# EAGLE board Stand Alone Portable (EAGLE 5.11)
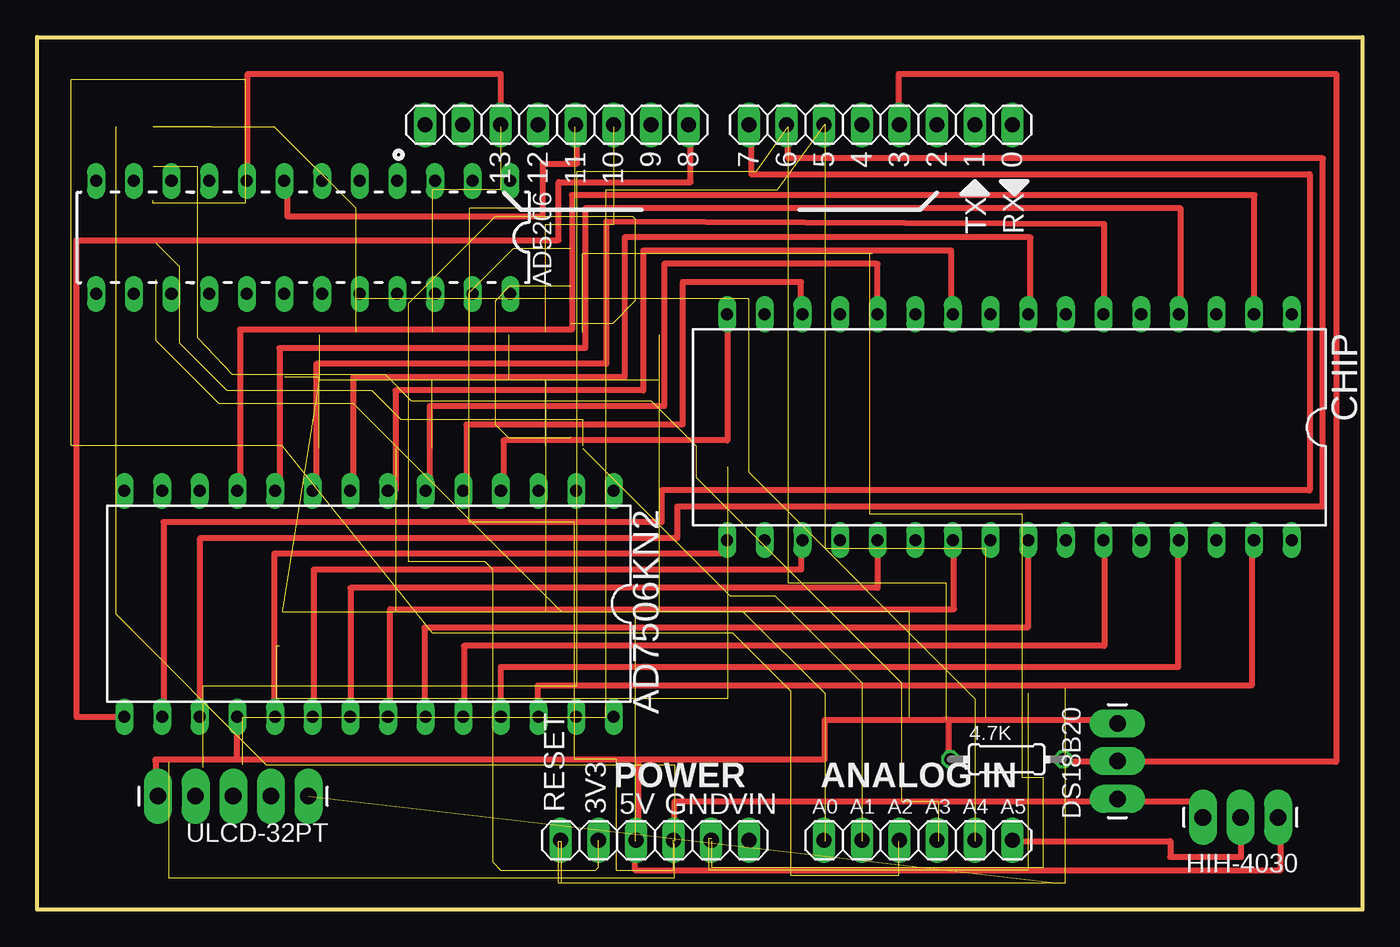
[diagram p0: board, top side]
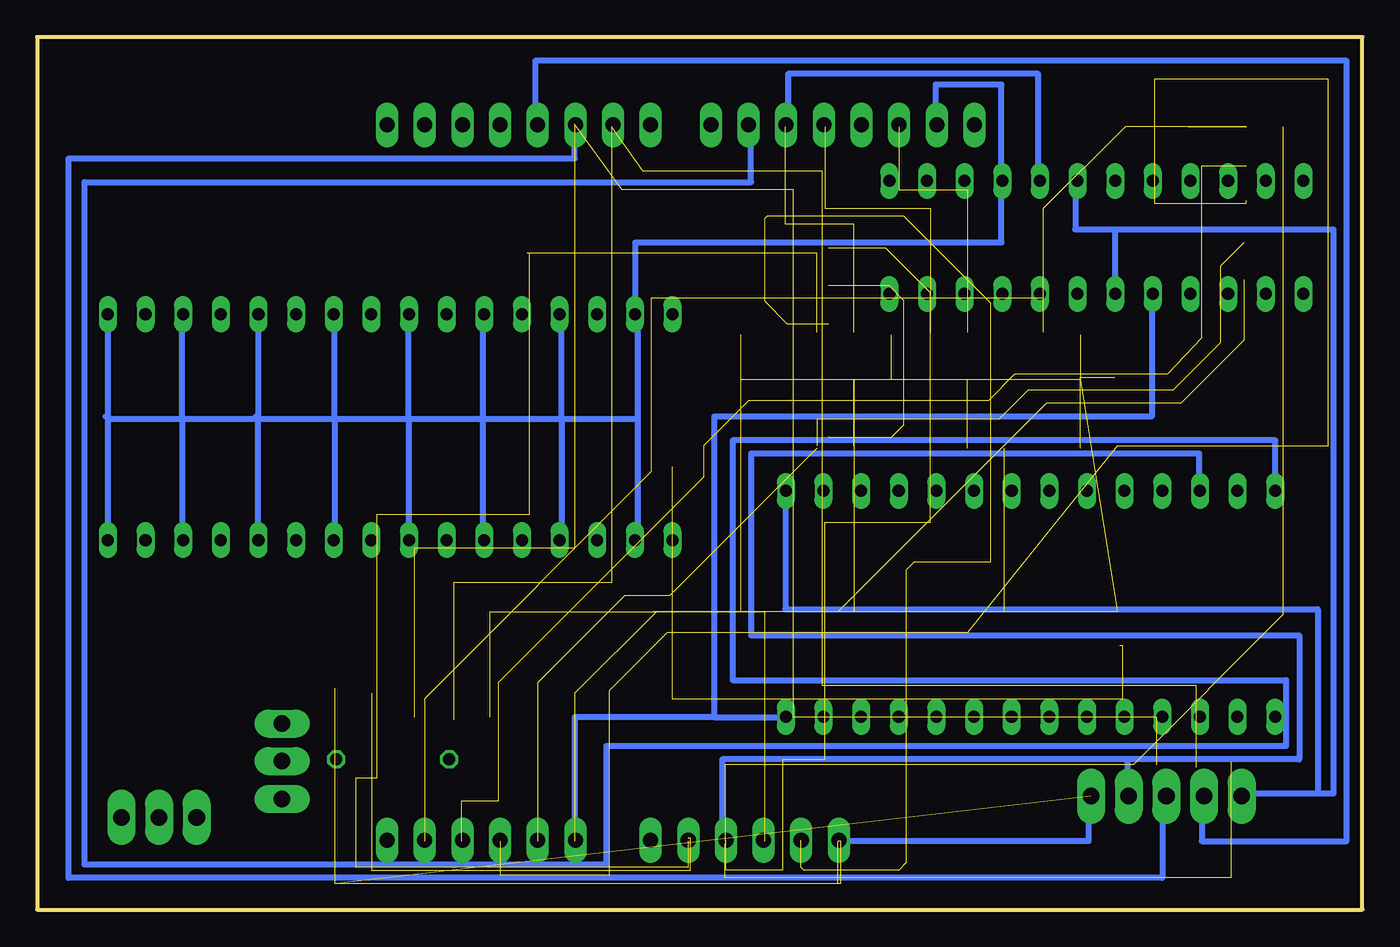
[diagram p1: board, bottom side, seen from below]

Size 89.43 x 58.85 mm. Coordinates in mm from the lower left corner, seen from the top.
Outline: 0,58.85 89.43,58.85 89.43,0 0,0 0,58.85
Copper layers (1*16): Top 0.035mm / dielectric 1.5mm / Bottom 0.035mm
Design rules "ArduinoDEF": minimum track width 6mil, minimum drill 12mil, track to track 6mil, track to pad 6mil, pad to pad 6mil, via to via 6mil, smd to smd 6mil, copper to edge 20mil, drill to drill 6mil, minimum pad ring 8mil, minimum via ring 8mil, stop-mask expansion 0mil, vias tented up to drill 0mil, thermal gap 10mil
Net classes: 0 default: width 0.254 mm, clearance 0.254 mm; 1 power: width 0.61 mm, drill 0.61 mm, clearance 0.254 mm; 2 gnd: width 0.305 mm, drill 0.559 mm, clearance 0.254 mm; 3 usbvcc: width 0.508 mm, drill 0.61 mm, clearance 0.254 mm; 4 aref: width 0.406 mm, drill 0.61 mm, clearance 0.254 mm
vRestrict: area 25.2,46.2 to 26.9,51.3; area 27.7,47.6 to 29.4,51.3; area 30.8,47.5 to 31.9,50.9; area 33.3,47.5 to 34.4,50.9; area 35.8,47.5 to 37,50.9; area 38.4,47.5 to 39.5,50.9; area 41,49.4 to 42.2,50.9; area 42.6,47.2 to 49.9,49; area 62.6,46.3 to 64,48.9; area 65.2,46.3 to 66.6,48.9; area 63.7,37.9 to 67.1,39.3; area 2.9,24 to 4.3,32.2; 14 more areas

## Footprints (pad centres in the part's own frame; a part is rotated, then mirrored left to right if it is on the bottom)
0204/7 = drill 0.813 octagon: 1 -3.81,0; 2 3.81,0
1X06 = drill 1.016 long: 1 -6.35,0; 2 -3.81,0; 3 -1.27,0; 4 1.27,0; 5 3.81,0; 6 6.35,0
DIL24 = drill 0.813 long: 1 -13.97,-3.81; 2 -11.43,-3.81; 3 -8.89,-3.81; 4 -6.35,-3.81; 5 -3.81,-3.81; 6 -1.27,-3.81; 7 1.27,-3.81; 8 3.81,-3.81; 9 6.35,-3.81; 10 8.89,-3.81; 11 11.43,-3.81; 12 13.97,-3.81; 13 13.97,3.81; 14 11.43,3.81; 15 8.89,3.81; 16 6.35,3.81; 17 3.81,3.81; 18 1.27,3.81; 19 -1.27,3.81; 20 -3.81,3.81; 21 -6.35,3.81; 22 -8.89,3.81; 23 -11.43,3.81; 24 -13.97,3.81
DIL28-6 = drill 0.813 long: 1 -16.51,-7.62; 2 -13.97,-7.62; 3 -11.43,-7.62; 4 -8.89,-7.62; 5 -6.35,-7.62; 6 -3.81,-7.62; 7 -1.27,-7.62; 8 1.27,-7.62; 9 3.81,-7.62; 10 6.35,-7.62; 11 8.89,-7.62; 12 11.43,-7.62; 13 13.97,-7.62; 14 16.51,-7.62; 15 16.51,7.62; 16 13.97,7.62; 17 11.43,7.62; 18 8.89,7.62; 19 6.35,7.62; 20 3.81,7.62; 21 1.27,7.62; 22 -1.27,7.62; 23 -3.81,7.62; 24 -6.35,7.62; 25 -8.89,7.62; 26 -11.43,7.62; 27 -13.97,7.62; 28 -16.51,7.62
DIL32 = drill 0.813 long: 1 -19.05,-7.62; 2 -16.51,-7.62; 3 -13.97,-7.62; 4 -11.43,-7.62; 5 -8.89,-7.62; 6 -6.35,-7.62; 7 -3.81,-7.62; 8 -1.27,-7.62; 9 1.27,-7.62; 10 3.81,-7.62; 11 6.35,-7.62; 12 8.89,-7.62; 13 11.43,-7.62; 14 13.97,-7.62; 15 16.51,-7.62; 16 19.05,-7.62; 17 19.05,7.62; 18 16.51,7.62; 19 13.97,7.62; 20 11.43,7.62; 21 8.89,7.62; 22 6.35,7.62; 23 3.81,7.62; 24 1.27,7.62; 25 -1.27,7.62; 26 -3.81,7.62; 27 -6.35,7.62; 28 -8.89,7.62; 29 -11.43,7.62; 30 -13.97,7.62; 31 -16.51,7.62; 32 -19.05,7.62
1X03_LONGPADS = drill 1.118 pad 1.88 long: 1 0,0; 2 2.54,0; 3 5.08,0
1X08 = drill 1.016 long: 1 -8.89,0; 2 -6.35,0; 3 -3.81,0; 4 -1.27,0; 5 1.27,0; 6 3.81,0; 7 6.35,0; 8 8.89,0
1X05_LONGPADS = drill 1.118 pad 1.88 long: 1 0,0; 2 2.54,0; 3 5.08,0; 4 7.62,0; 5 10.16,0

## Placement (x,y rotation side)
4.7K  [0204/7]  65.43,10.13 0 top
AD  [1X06]  59.46,4.67 0 top
AD5206  [DIL24]  17.96,45.34 180 top
AD7506KN2  [DIL28-6]  22.4,20.62 180 top
CHIP  [DIL32]  65.61,32.54 180 top
DS18B20  [1X03_LONGPADS]  72.9,7.47 90 top
HIH-4030  [1X03_LONGPADS]  83.74,6.22 180 top
IOH  [1X08]  35.08,52.93 180 top
IOL  [1X08]  56.92,52.93 180 top
POWER  [1X06]  41.68,4.67 0 top
ULCD-32PT  [1X05_LONGPADS]  18.31,7.65 180 top

## Library data of the parts
4.7K = rcl
AD IOH IOL POWER = pinhead
AD5206 DS18B20 HIH-4030 ULCD-32PT = SparkFun
AD7506KN2 = 40xx
CHIP = atmel

## Nets
N$6: POWER.4
N$7: POWER.2
N$8: IOL.1
N$9: IOL.2
N$10: POWER.5
N$11: AD.1
N$13: AD.2
N$14: AD.3
N$16: AD.4
N$17: AD.5
S$6: ULCD-32PT.1

## Tracks (layer width: path | path; a pad name or v marks a point on that pad's centre or on a via)
N$1  (6 unrouted)
N$6  (9 unrouted)
N$7  (14 unrouted)
S$1  (8 unrouted)
S$2  (8 unrouted)
S$3  (3 unrouted)
S$4  (4 unrouted)
S$5  (4 unrouted)
S$6  (3 unrouted)
S$7  (1 unrouted)
S$8  (21 unrouted)
S$9  (3 unrouted)
S$10  (3 unrouted)
S$11  (3 unrouted)
S$12  (7 unrouted)
S$13  (9 unrouted)
S$14  (4 unrouted)
S$15  (7 unrouted)
S$16  (12 unrouted)
S$17  (5 unrouted)
S$18  (8 unrouted)
S$19  (1 unrouted)
S$20  (4 unrouted)
S$21  (2 unrouted)
S$22  (1 unrouted)
S$23  (2 unrouted)
S$24
  Bottom 0.406: 48.9,33.07 48.9,40.18 | 54.05,33.07 59.39,33.07 | 59.39,33.07 64.36,33.07 | 64.36,33.07 69.34,33.07 | 69.34,33.07 79.65,33.07 | 54.05,33.07 54.05,40.36 | 48.9,33.07 54.05,33.07 | 64.36,33.07 64.36,40.18 | 69.34,33.07 69.34,40.36 | 79.65,33.07 79.65,40.18 | 84.63,40.18 84.63,33.07 79.65,33.07 | 79.65,33.07 79.65,25.07 | 69.34,33.07 69.34,24.89 69.52,24.89 | 64.36,33.07 64.36,25.07 | 59.39,33.07 59.39,24.89 | 54.05,33.07 54.05,25.07 | 48.9,25.07 48.9,33.07
S$25  (1 unrouted)
S$26  (13 unrouted)
S$27  (1 unrouted)
S$28  (5 unrouted)
S$29
  Bottom 0.406: 59.39,40.36 59.39,33.25
S$30
  Bottom 0.406: 74.5,40 74.5,33.25 | 74.5,25.07 74.5,33.25 | 74.5,33.25 74.68,33.25
S$31
  Bottom 0.406: 84.63,25.07 84.63,33.25 84.81,33.25
S$32
  Bottom 0.406: 21.87,49.07 21.87,56.36 38.76,56.36 38.76,52.81 38.94,52.81
S$33  (4 unrouted)
S$34
  Top 0.406: 46.58,40 46.58,31.65 31.47,31.65 31.47,28.27
S$35
  Top 0.406: 51.56,40.36 51.56,42.32 43.56,42.32 43.56,32.72 28.98,32.72 28.98,28.09
S$36
  Top 0.406: 56.72,40.36 56.72,43.56 42.32,43.56 42.32,33.96 26.49,33.96 26.49,28.27
S$37
  Top 0.406: 61.7,40.18 61.7,44.45 40.89,44.45 40.89,35.03 24.18,35.03 24.18,28.27 23.83,28.27
S$38
  Top 0.406: 67.03,40.36 67.03,45.34 39.65,45.34 39.65,35.92 21.34,35.92 21.34,28.45
S$39
  Top 0.406: 72.01,40.18 72.01,46.23 38.4,46.41 38.4,36.8 18.85,36.8 18.85,28.27
S$40
  Top 0.406: 77.17,40.36 77.17,47.29 36.98,47.29 36.98,37.87 16.36,37.87 16.36,28.27 16.18,28.27
S$41
  Top 0.406: 82.14,40.36 82.14,48.18 36.09,48.18 36.09,39.12 13.69,39.12 13.69,28.27
S$42
  Top 0.406: 46.58,24 16,24 16,12.98
S$43
  Top 0.406: 51.56,25.25 51.56,22.94 18.67,22.94 18.67,12.98
S$44
  Top 0.406: 56.72,24.89 56.72,21.69 21.16,21.69 21.16,12.98
S$45
  Top 0.406: 23.83,12.98 23.83,20.27 61.87,20.27 61.87,25.07
S$46
  Top 0.406: 66.85,24.89 66.85,19.02 26.14,19.02 26.14,12.98
S$47
  Top 0.406: 72.01,25.25 72.01,17.78 28.8,17.78 28.8,12.98
S$48
  Top 0.406: 76.99,25.07 76.99,16.36 31.29,16.36 31.29,12.8
S$49
  Top 0.406: 81.97,25.07 81.97,15.11 33.78,15.11 33.78,12.98
S$50
  Bottom 0.406: 48.9,40.36 49.07,40.36 49.07,44.98 24.36,44.98 24.36,55.65 28.8,55.65 28.8,52.81
S$51
  Bottom 0.406: 11.02,28.45 11.02,30.76 41.25,30.76 41.25,18.49 4.27,18.49 4.27,10.13 15.82,10.13 | 15.82,7.82 15.82,10.13 | 15.82,10.13 16,10.13 43.21,10.13 43.21,4.44 43.03,4.44
S$52
  Top 0.406: 16.89,49.43 16.89,46.76 34.14,46.76 34.14,50.32 36.45,50.32 36.45,52.98
S$53
  Top 0.406: 14.22,49.07 14.22,56.36 31.29,56.36 31.29,52.81 31.65,52.81
S$54
  Bottom 0.406: 10.85,7.82 10.85,4.62 1.07,4.62 1.07,57.25 55.83,57.25 55.83,52.63 55.65,52.63
S$55
  Bottom 0.406: 13.51,8.18 13.51,2.13 87.3,2.13 87.3,50.67 53.16,50.67 53.16,52.98
S$56
  Bottom 0.406: 5.87,28.27 5.87,31.65 42.49,31.65 42.49,15.47 5.16,15.47 5.16,11.02 51.03,11.02 51.03,3.02 86.23,3.02 86.23,49.07 41.25,49.07 41.25,53.16 41.61,53.16
S$57
  Bottom 0.406: 18.49,7.65 18.49,4.62 35.38,4.62
S$58
  Bottom 0.406: 14.22,41.43 14.22,33.25 43.74,33.25 43.74,12.98 | 43.74,12.98 38.94,12.98 | 43.74,12.98 53.16,12.98 53.16,4.8
S$59
  Bottom 0.406: 38.94,28.27 38.94,20.27 3.02,20.27 3.02,7.82 | 19.38,48.89 19.38,45.87 16.71,45.87 | 16.71,45.87 1.96,45.87 1.96,7.82 3.02,7.82 | 3.02,7.82 8.53,7.82 | 16.71,45.87 16.71,41.43
S$60
  Top 0.406: 8.18,7.82 8,10.13 13.51,10.13 | 13.51,10.13 40.54,10.13 | 40.54,10.13 40.54,4.62 | 13.51,10.13 13.51,12.98 | 40.54,10.13 53.16,10.13 53.16,12.8 61.16,12.8 61.52,12.8 | 61.52,12.8 72.72,12.8 | 61.52,9.96 61.52,12.8
S$61
  Top 0.406: 11.02,12.98 11.02,25.07 43.21,25.07 43.21,27.2 86.77,27.2 86.77,50.67 50.67,50.67 50.67,52.98
S$62
  Top 0.406: 46.58,25.07 46.41,25.07 46.41,24.18
S$63
  Top 0.406: 48.18,52.81 48.18,49.61 85.88,49.61 85.88,28.27 42.14,28.27 42.14,26.14 8.53,26.14 8.53,12.8
S$64
  Top 0.406: 5.87,12.98 2.67,12.98 2.67,45.16 35.2,45.16 35.2,49.07 44.09,49.07 44.09,52.81
S$65
  Top 0.406: 65.96,4.62 76.45,4.62 76.45,3.56 81.25,3.56 81.25,6.22
S$66
  Top 0.406: 40.36,4.62 40.36,2.67 83.92,2.67 83.92,6.4
S$67
  Top 0.406: 43.03,4.8 43.03,7.29 78.59,7.29 78.59,6.05
S$68
  Top 0.406: 58.14,52.98 58.14,56.36 87.66,56.36 87.66,9.96 69.34,9.96 69.34,10.13

## Text on the board
tPlace: 13 | 12 | 11 | 10 | 9 | 8 | 7 | 6 | 5 | 4 | 3 | 2 | 1 | 0
tNames: TX | RX | ANALOG IN | RESET | 3V3 | 5V | GND | VIN | A0 | A1 | A2 | A3 | A4 | A5
ReferenceLC: L | TX | RX | PC1 | PC2
214bmp: D:/SmartProjects/Snc/a4_bn_logo2.bmp